# EAGLE board preauto (EAGLE 9.3.0)
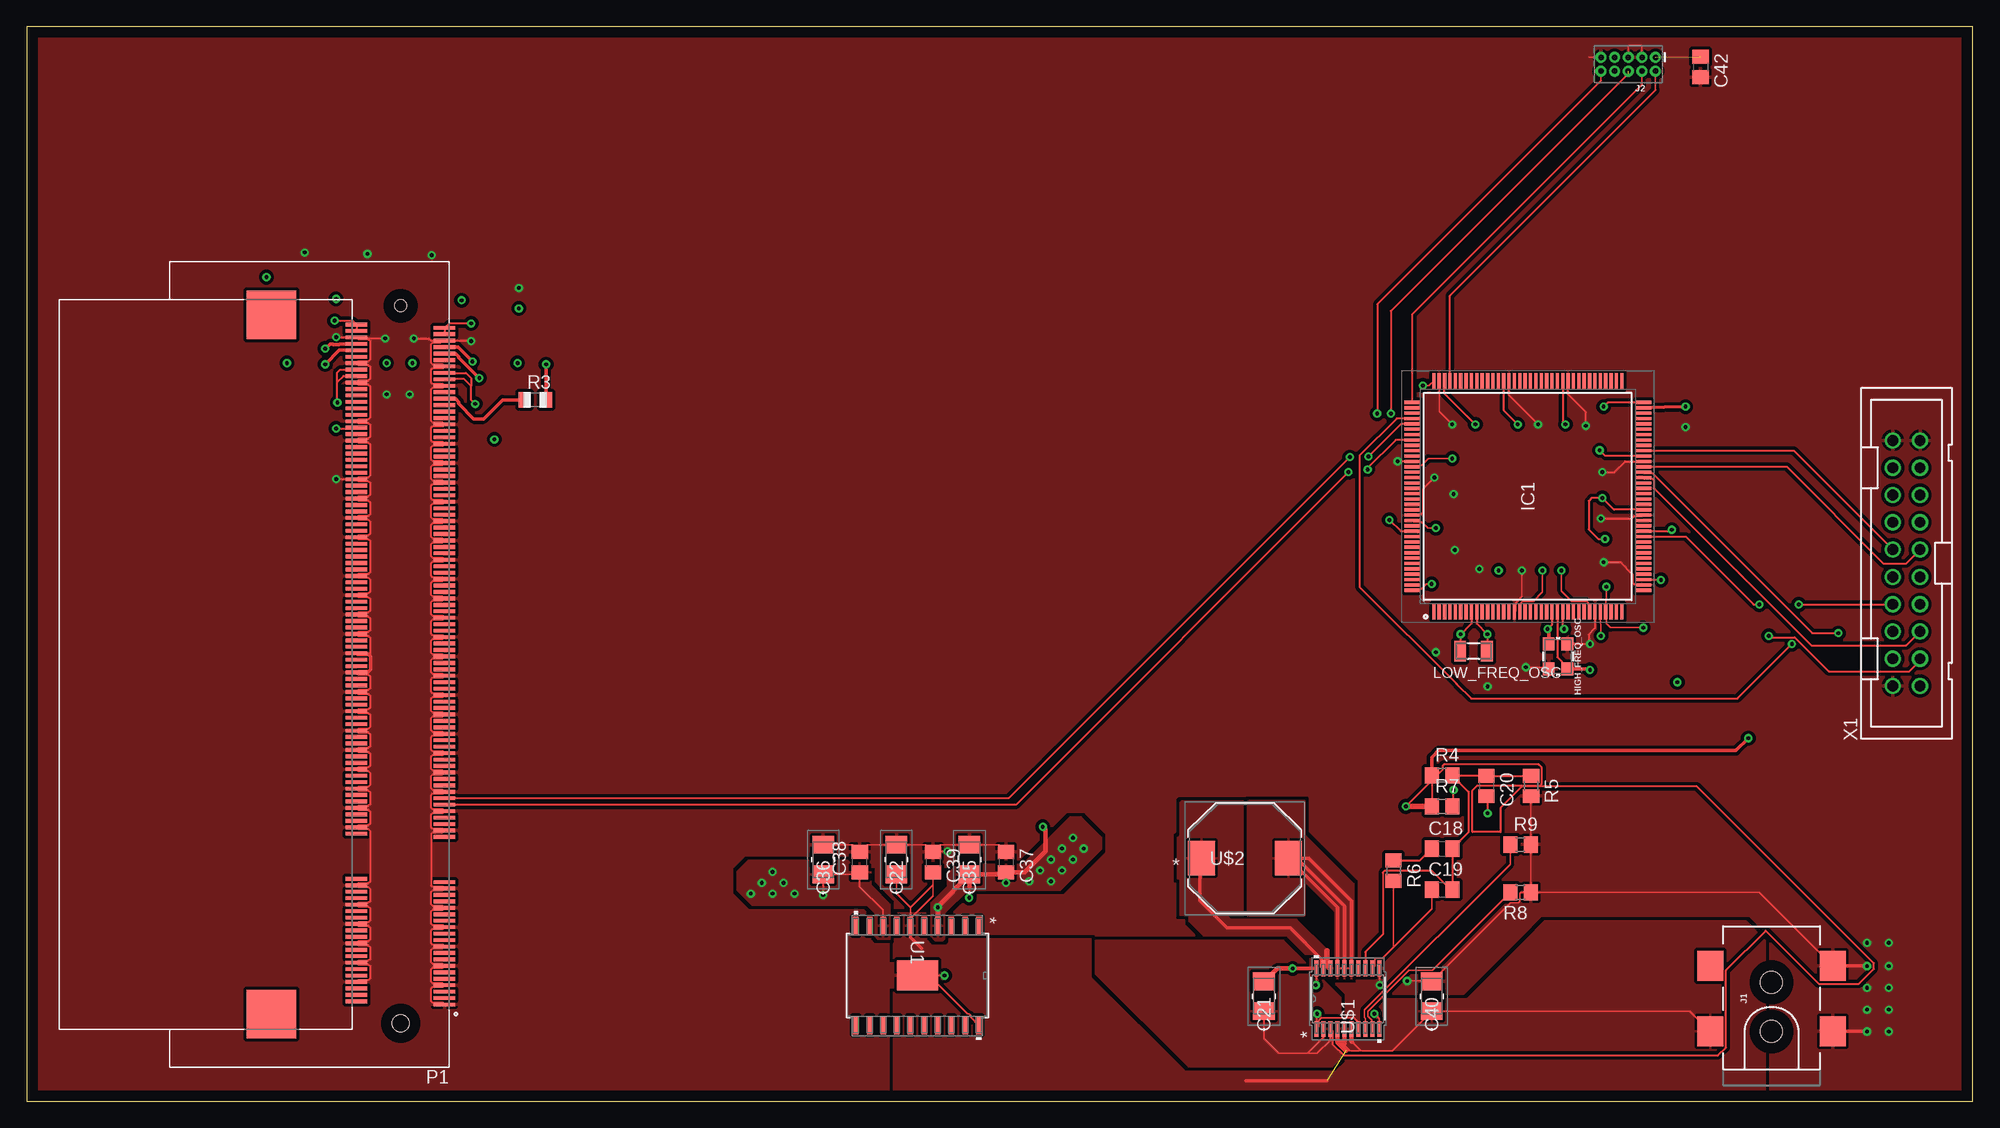
[diagram p0: board, top side]
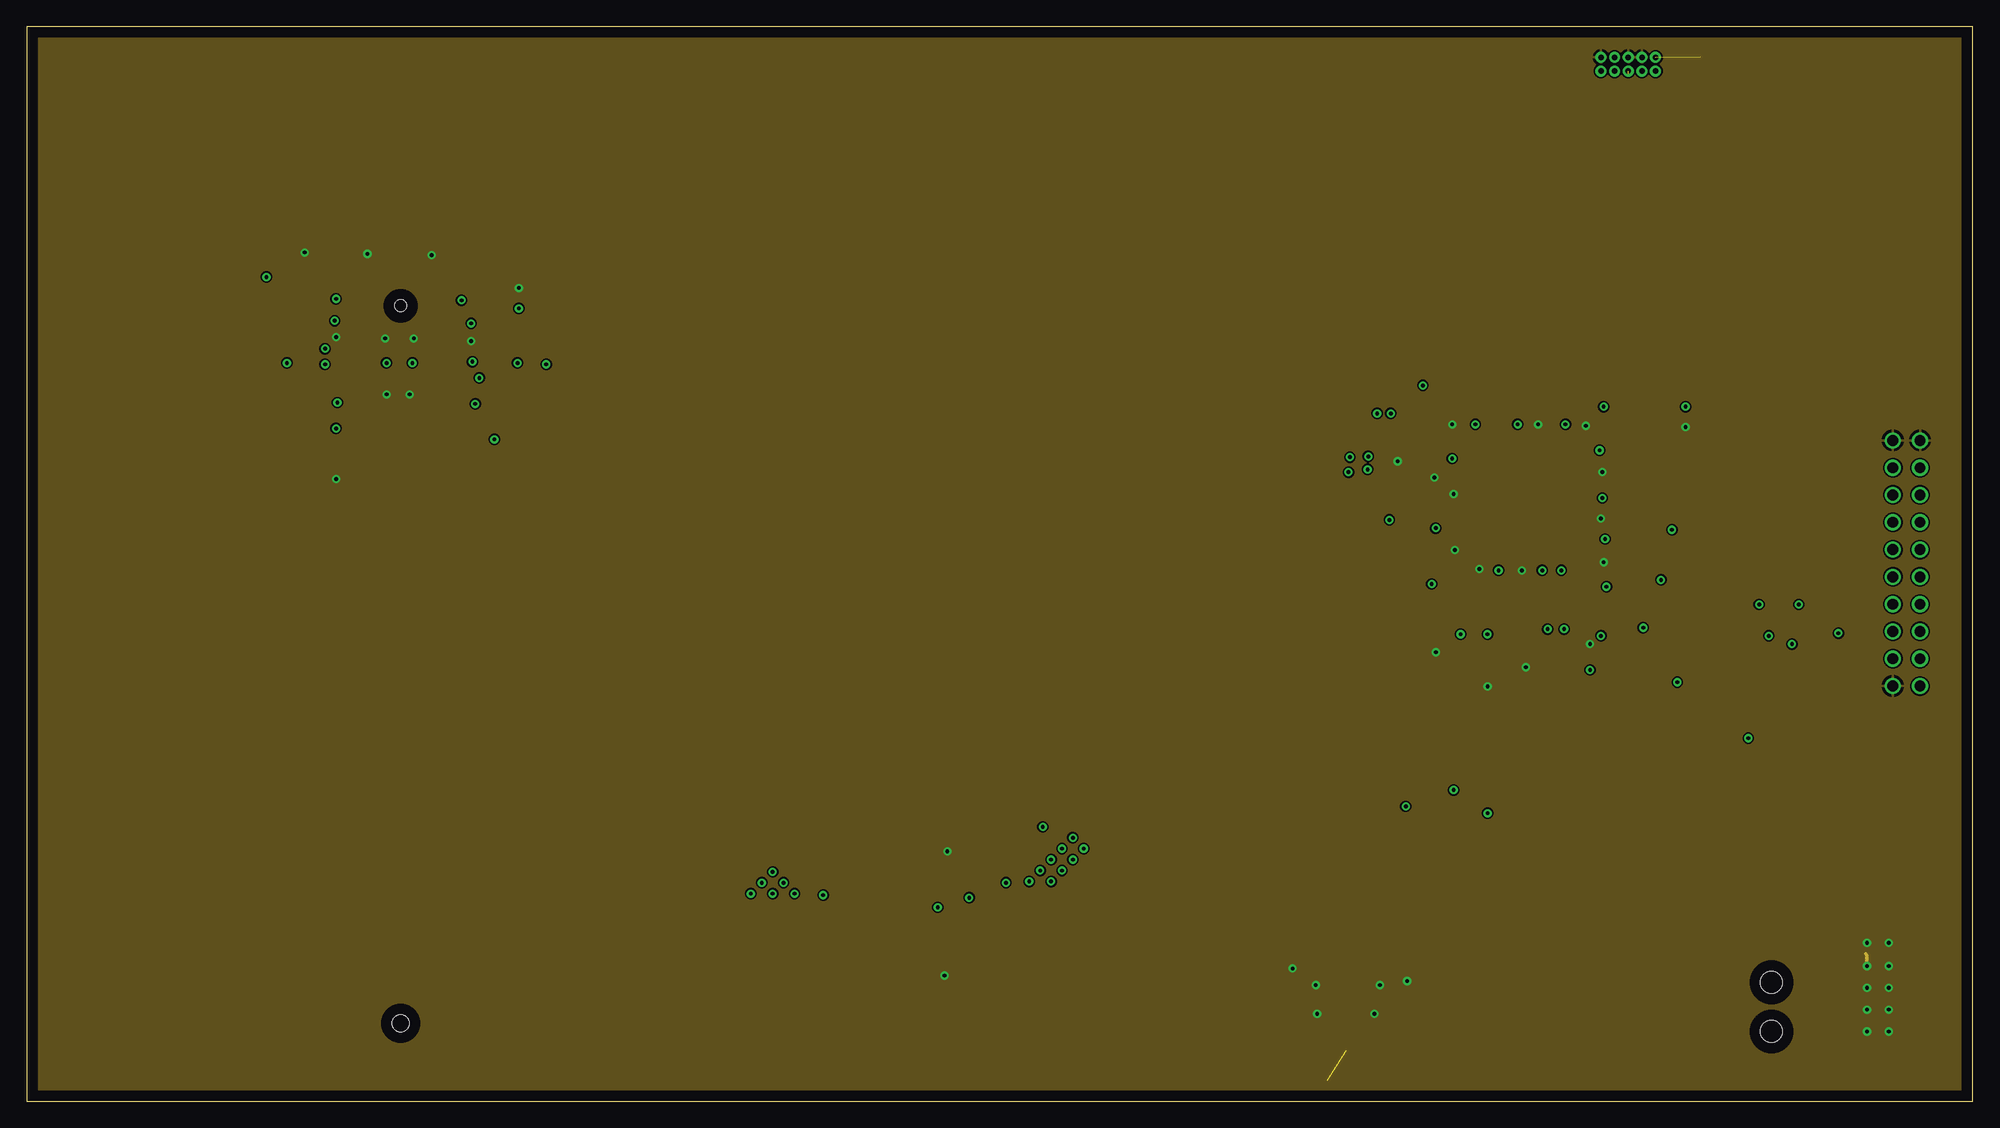
[diagram p1: board, inner layer Route2]
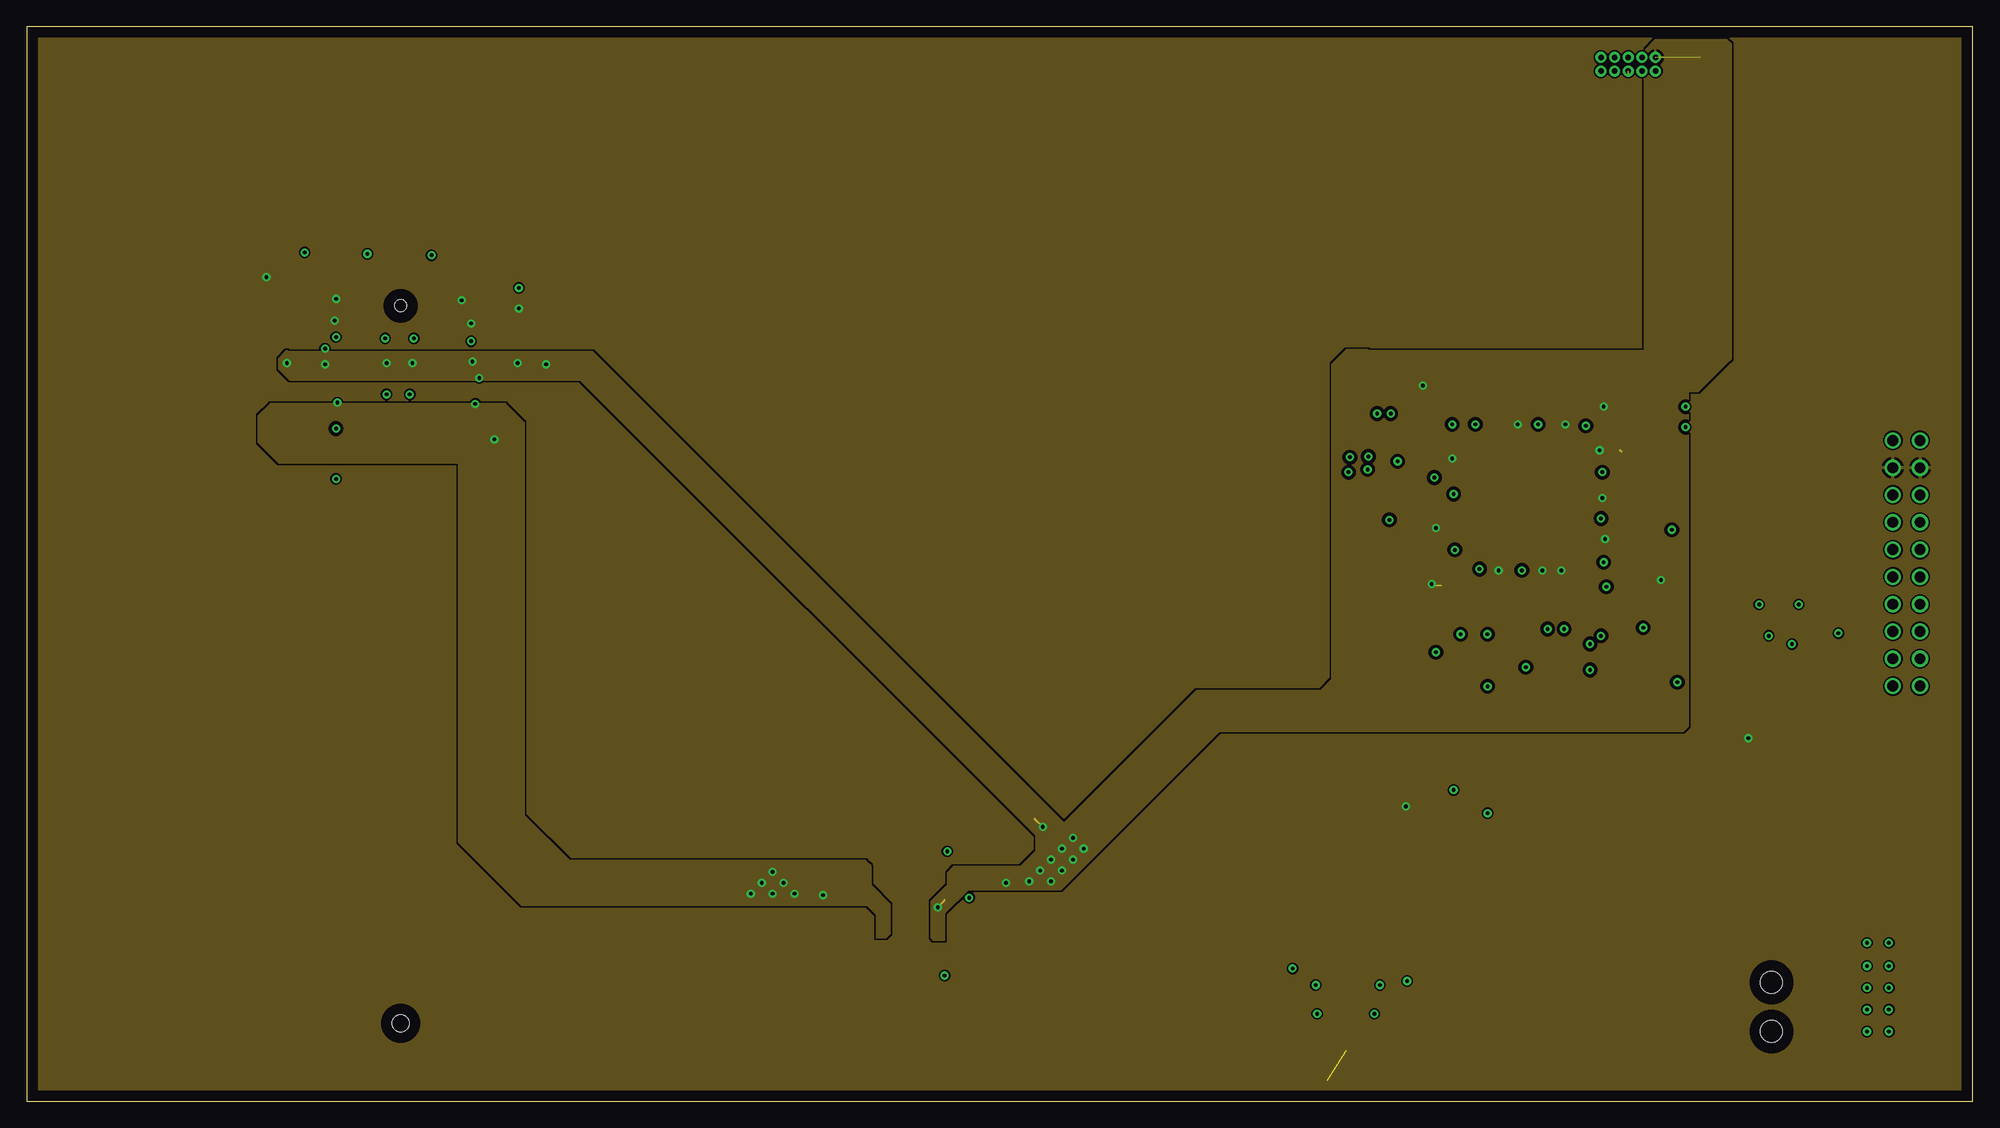
[diagram p2: board, inner layer Route3]
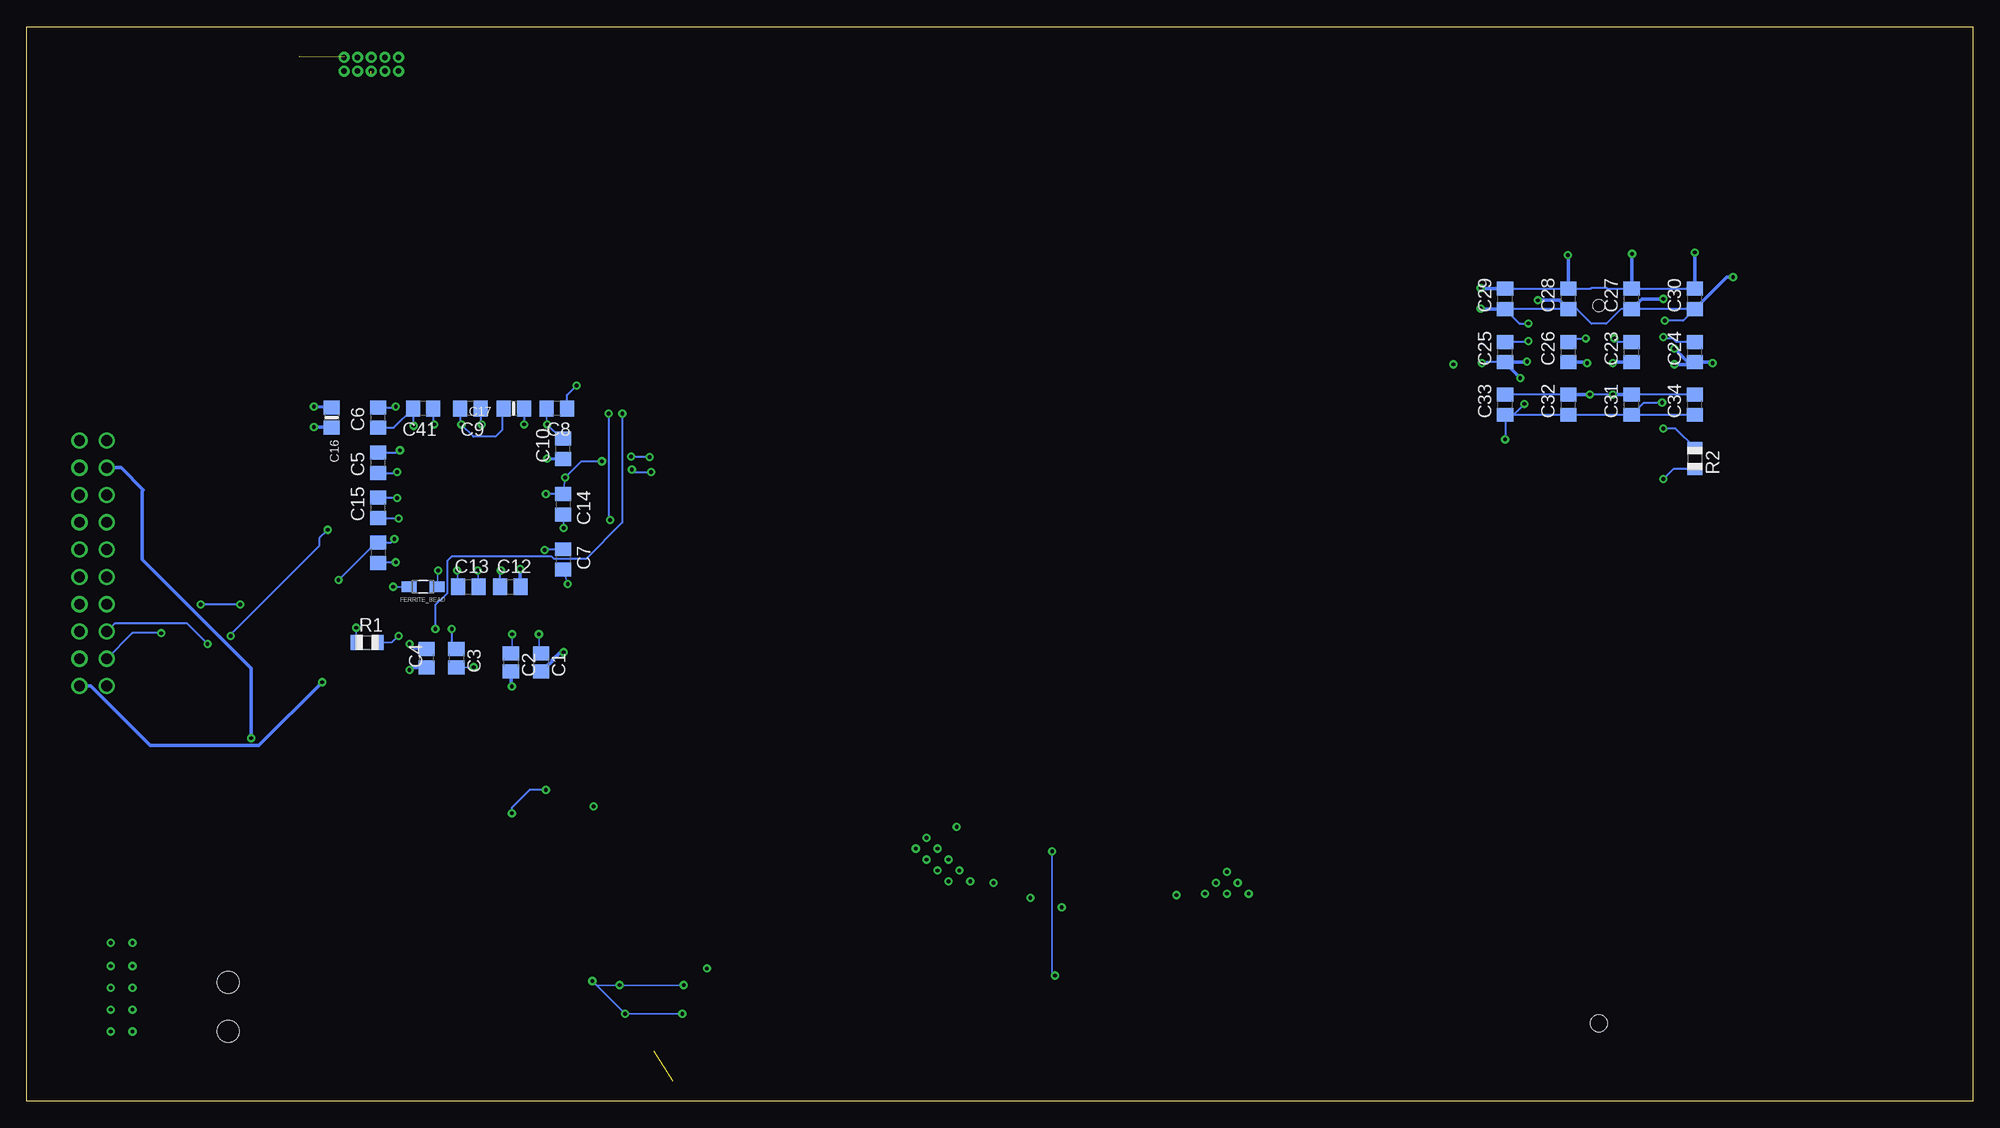
[diagram p3: board, bottom side, seen from below]

Size 181.1 x 100 mm. Coordinates in mm from the lower left corner, seen from the top.
Outline: 0,0 181.1,0 181.1,100 0,100 0,0
Copper layers (1+2*3+16): Top 0.035mm / dielectric 1.5mm / Route2 0.035mm / dielectric 0.15mm / Route3 0.035mm / dielectric 0.2mm / Bottom 0.035mm
Design rules "default *": minimum track width 6mil, minimum drill 0.35mm, track to track 6mil, track to pad 6mil, pad to pad 6mil, via to via 6mil, smd to smd 6mil, copper to edge 40mil, drill to drill 6mil, minimum pad ring 10mil, minimum via ring 8mil, stop-mask expansion 4mil, vias tented up to drill 0mil, thermal gap 10mil

## Footprints (pad centres in the part's own frame; a part is rotated, then mirrored left to right if it is on the bottom)
C0805 = smd 1.3 x 1.5: 1 -0.85,0; 2 0.85,0
C0805' = smd 1.3 x 1.5: 1 -0.95,0; 2 0.95,0
0805-NO = smd 1.3 x 1.5: 1 -0.95,0; 2 0.95,0
F95-A-M = smd 1.651 x 2.007: 1 -1.384,0; 2 1.384,0
WE-CBA_0805(W=4) = smd 1.4 x 1: 1 -1.3,0; 2 1.3,0
CRYSTAL-SMD-3.2X2.5MM = smd 1.2 x 1.1: 1 -1.175,-0.875; 2 1.175,-0.875; 3 1.175,0.875; 4 -1.175,0.875
QFP50P2200X2200X160-144N = smd 1.475 x 0.3: 1 -10.738,8.75; 2 -10.738,8.25; 3 -10.738,7.75; 4 -10.738,7.25; 5 -10.738,6.75; 6 -10.738,6.25; 7 -10.738,5.75; 8 -10.738,5.25; 9 -10.738,4.75; 10 -10.738,4.25; 11 -10.738,3.75; 12 -10.738,3.25; 13 -10.738,2.75; 14 -10.738,2.25; 15 -10.738,1.75; 16 -10.738,1.25; 17 -10.738,0.75; 18 -10.738,0.25; 19 -10.738,-0.25; 20 -10.738,-0.75; 21 -10.738,-1.25; 22 -10.738,-1.75; 23 -10.738,-2.25; 24 -10.738,-2.75; 25 -10.738,-3.25; 26 -10.738,-3.75; 27 -10.738,-4.25; 28 -10.738,-4.75; 29 -10.738,-5.25; 30 -10.738,-5.75; 31 -10.738,-6.25; 32 -10.738,-6.75; 33 -10.738,-7.25; 34 -10.738,-7.75; 35 -10.738,-8.25; 36 -10.738,-8.75; 73 10.738,-8.75; 74 10.738,-8.25; 75 10.738,-7.75; 76 10.738,-7.25; 77 10.738,-6.75; 78 10.738,-6.25; 79 10.738,-5.75; 80 10.738,-5.25; 81 10.738,-4.75; 82 10.738,-4.25; 83 10.738,-3.75; 84 10.738,-3.25; 85 10.738,-2.75; 86 10.738,-2.25; 87 10.738,-1.75; 88 10.738,-1.25; 89 10.738,-0.75; 90 10.738,-0.25; 91 10.738,0.25; 92 10.738,0.75; 93 10.738,1.25; 94 10.738,1.75; 95 10.738,2.25; 96 10.738,2.75; 97 10.738,3.25; 98 10.738,3.75; 99 10.738,4.25; 100 10.738,4.75; 101 10.738,5.25; 102 10.738,5.75; 103 10.738,6.25; 104 10.738,6.75; 105 10.738,7.25; 106 10.738,7.75; 107 10.738,8.25; 108 10.738,8.75 | smd 0.3 x 1.475: 37 -8.75,-10.738; 38 -8.25,-10.738; 39 -7.75,-10.738; 40 -7.25,-10.738; 41 -6.75,-10.738; 42 -6.25,-10.738; 43 -5.75,-10.738; 44 -5.25,-10.738; 45 -4.75,-10.738; 46 -4.25,-10.738; 47 -3.75,-10.738; 48 -3.25,-10.738; 49 -2.75,-10.738; 50 -2.25,-10.738; 51 -1.75,-10.738; 52 -1.25,-10.738; 53 -0.75,-10.738; 54 -0.25,-10.738; 55 0.25,-10.738; 56 0.75,-10.738; 57 1.25,-10.738; 58 1.75,-10.738; 59 2.25,-10.738; 60 2.75,-10.738; 61 3.25,-10.738; 62 3.75,-10.738; 63 4.25,-10.738; 64 4.75,-10.738; 65 5.25,-10.738; 66 5.75,-10.738; 67 6.25,-10.738; 68 6.75,-10.738; 69 7.25,-10.738; 70 7.75,-10.738; 71 8.25,-10.738; 72 8.75,-10.738; 109 8.75,10.738; 110 8.25,10.738; 111 7.75,10.738; 112 7.25,10.738; 113 6.75,10.738; 114 6.25,10.738; 115 5.75,10.738; 116 5.25,10.738; 117 4.75,10.738; 118 4.25,10.738; 119 3.75,10.738; 120 3.25,10.738; 121 2.75,10.738; 122 2.25,10.738; 123 1.75,10.738; 124 1.25,10.738; 125 0.75,10.738; 126 0.25,10.738; 127 -0.25,10.738; 128 -0.75,10.738; 129 -1.25,10.738; 130 -1.75,10.738; 131 -2.25,10.738; 132 -2.75,10.738; 133 -3.25,10.738; 134 -3.75,10.738; 135 -4.25,10.738; 136 -4.75,10.738; 137 -5.25,10.738; 138 -5.75,10.738; 139 -6.25,10.738; 140 -6.75,10.738; 141 -7.25,10.738; 142 -7.75,10.738; 143 -8.25,10.738; 144 -8.75,10.738
POWER_JACK_SMD = smd 2.8 x 2.4: GND 0,-5.7; P$4 6.1,-5.7; VIN0 0,5.7; VIN1 6.1,5.7 | hole 2.032: 0,0; 4.572,0
2X5-PTH-1.27MM = drill 0.508 pad 1: 1 -2.54,-0.635; 2 -2.54,0.635; 3 -1.27,-0.635; 4 -1.27,0.635; 5 0,-0.635; 6 0,0.635; 7 1.27,-0.635; 8 1.27,0.635; 9 2.54,-0.635; 10 2.54,0.635
FC135 = smd 1.1 x 1.9: X1 -1.25,0; X2 1.25,0
TE_1-1473005-4 = smd 2 x 0.35: 1 -4.1,31.65; 2 4.1,31.35; 3 -4.1,31.05; 4 4.1,30.75; 5 -4.1,30.45; 6 4.1,30.15; 7 -4.1,29.85; 8 4.1,29.55; 9 -4.1,29.25; 10 4.1,28.95; 11 -4.1,28.65; 12 4.1,28.35; 13 -4.1,28.05; 14 4.1,27.75; 15 -4.1,27.45; 16 4.1,27.15; 17 -4.1,26.85; 18 4.1,26.55; 19 -4.1,26.25; 20 4.1,25.95; 21 -4.1,25.65; 22 4.1,25.35; 23 -4.1,25.05; 24 4.1,24.75; 25 -4.1,24.45; 26 4.1,24.15; 27 -4.1,23.85; 28 4.1,23.55; 29 -4.1,23.25; 30 4.1,22.95; 31 -4.1,22.65; 32 4.1,22.35; 33 -4.1,22.05; 34 4.1,21.75; 35 -4.1,21.45; 36 4.1,21.15; 37 -4.1,20.85; 38 4.1,20.55; 39 -4.1,20.25; 40 4.1,19.95; 41 -4.1,16.05; 42 4.1,15.75; 43 -4.1,15.45; 44 4.1,15.15; 45 -4.1,14.85; 46 4.1,14.55; 47 -4.1,14.25; 48 4.1,13.95; 49 -4.1,13.65; 50 4.1,13.35; 51 -4.1,13.05; 52 4.1,12.75; 53 -4.1,12.45; 54 4.1,12.15; 55 -4.1,11.85; 56 4.1,11.55; 57 -4.1,11.25; 58 4.1,10.95; 59 -4.1,10.65; 60 4.1,10.35; 61 -4.1,10.05; 62 4.1,9.75; 63 -4.1,9.45; 64 4.1,9.15; 65 -4.1,8.85; 66 4.1,8.55; 67 -4.1,8.25; 68 4.1,7.95; 69 -4.1,7.65; 70 4.1,7.35; 71 -4.1,7.05; 72 4.1,6.75; 73 -4.1,6.45; 74 4.1,6.15; 75 -4.1,5.85; 76 4.1,5.55; 77 -4.1,5.25; 78 4.1,4.95; 79 -4.1,4.65; 80 4.1,4.35; 81 -4.1,4.05; 82 4.1,3.75; 83 -4.1,3.45; 84 4.1,3.15; 85 -4.1,2.85; 86 4.1,2.55; 87 -4.1,2.25; 88 4.1,1.95; 89 -4.1,1.65; 90 4.1,1.35; 91 -4.1,1.05; 92 4.1,0.75; 93 -4.1,0.45; 94 4.1,0.15; 95 -4.1,-0.15; 96 4.1,-0.45; 97 -4.1,-0.75; 98 4.1,-1.05; 99 -4.1,-1.35; 100 4.1,-1.65; 101 -4.1,-1.95; 102 4.1,-2.25; 103 -4.1,-2.55; 104 4.1,-2.85; 105 -4.1,-3.15; 106 4.1,-3.45; 107 -4.1,-3.75; 108 4.1,-4.05; 109 -4.1,-4.35; 110 4.1,-4.65; 111 -4.1,-4.95; 112 4.1,-5.25; 113 -4.1,-5.55; 114 4.1,-5.85; 115 -4.1,-6.15; 116 4.1,-6.45; 117 -4.1,-6.75; 118 4.1,-7.05; 119 -4.1,-7.35; 120 4.1,-7.65; 121 -4.1,-7.95; 122 4.1,-8.25; 123 -4.1,-8.55; 124 4.1,-8.85; 125 -4.1,-9.15; 126 4.1,-9.45; 127 -4.1,-9.75; 128 4.1,-10.05; 129 -4.1,-10.35; 130 4.1,-10.65; 131 -4.1,-10.95; 132 4.1,-11.25; 133 -4.1,-11.55; 134 4.1,-11.85; 135 -4.1,-12.15; 136 4.1,-12.45; 137 -4.1,-12.75; 138 4.1,-13.05; 139 -4.1,-13.35; 140 4.1,-13.65; 141 -4.1,-13.95; 142 4.1,-14.25; 143 -4.1,-14.55; 144 4.1,-14.85; 145 -4.1,-15.15; 146 4.1,-15.45; 147 -4.1,-15.75; 148 4.1,-16.05; 149 -4.1,-16.35; 150 4.1,-16.65; 151 -4.1,-16.95; 152 4.1,-17.25; 153 -4.1,-17.55; 154 4.1,-17.85; 155 -4.1,-18.15; 156 4.1,-18.45; 157 -4.1,-18.75; 158 4.1,-19.05; 159 -4.1,-19.35; 160 4.1,-19.65; 161 -4.1,-19.95; 162 4.1,-20.25; 163 -4.1,-20.55; 164 4.1,-20.85; 165 -4.1,-21.15; 166 4.1,-21.45; 167 -4.1,-21.75; 168 4.1,-22.05; 169 -4.1,-22.35; 170 4.1,-22.65; 171 -4.1,-22.95; 172 4.1,-23.25; 173 -4.1,-23.55; 174 4.1,-23.85; 175 -4.1,-24.15; 176 4.1,-24.45; 177 -4.1,-24.75; 178 4.1,-25.05; 179 -4.1,-25.35; 180 4.1,-25.65; 181 -4.1,-25.95; 182 4.1,-26.25; 183 -4.1,-26.55; 184 4.1,-26.85; 185 -4.1,-27.15; 186 4.1,-27.45; 187 -4.1,-27.75; 188 4.1,-28.05; 189 -4.1,-28.35; 190 4.1,-28.65; 191 -4.1,-28.95; 192 4.1,-29.25; 193 -4.1,-29.55; 194 4.1,-29.85; 195 -4.1,-30.15; 196 4.1,-30.45; 197 -4.1,-30.75; 198 4.1,-31.05; 199 -4.1,-31.35; 200 4.1,-31.65 | smd 4.6 x 4.5: P1 12,32.55; P2 12,-32.55 | hole 1.6: 0,33.4 | hole 1.1: 0,-33.4
R0805 = smd 1.1 x 1.4: 1 -1,0; 2 1,0
R0805' = smd 1.3 x 1.5: 1 -0.95,0; 2 0.95,0
DWP20_3P81X2P79-L = smd 1.676 x 0.508: 1 -4.636,5.715; 2 -4.636,4.445; 3 -4.636,3.175; 4 -4.636,1.905; 5 -4.636,0.635; 6 -4.636,-0.635; 7 -4.636,-1.905; 8 -4.636,-3.175; 9 -4.636,-4.445; 10 -4.636,-5.715; 11 4.636,-5.715; 12 4.636,-4.445; 13 4.636,-3.175; 14 4.636,-1.905; 15 4.636,-0.635; 16 4.636,0.635; 17 4.636,1.905; 18 4.636,3.175; 19 4.636,4.445; 20 4.636,5.715 | smd 2.79 x 3.81: EPAD 0,0
TSSOP-20_FE/CA = smd 1.473 x 0.356: 1 -2.819,2.926; 2 -2.819,2.276; 3 -2.819,1.626; 4 -2.819,0.975; 5 -2.819,0.325; 6 -2.819,-0.325; 7 -2.819,-0.975; 8 -2.819,-1.626; 9 -2.819,-2.276; 10 -2.819,-2.926; 11 2.819,-2.926; 12 2.819,-2.276; 13 2.819,-1.626; 14 2.819,-0.975; 15 2.819,-0.325; 16 2.819,0.325; 17 2.819,0.975; 18 2.819,1.626; 19 2.819,2.276; 20 2.819,2.926
IND_10040 = smd 2.5 x 3.2: 1 -4.05,0; 2 4.05,0
PAK100/2500-20 = drill 1 pad 1.422: 1 -11.43,-1.27; 2 -11.43,1.27; 3 -8.89,-1.27; 4 -8.89,1.27; 5 -6.35,-1.27; 6 -6.35,1.27; 7 -3.81,-1.27; 8 -3.81,1.27; 9 -1.27,-1.27; 10 -1.27,1.27; 11 1.27,-1.27; 12 1.27,1.27; 13 3.81,-1.27; 14 3.81,1.27; 15 6.35,-1.27; 16 6.35,1.27; 17 8.89,-1.27; 18 8.89,1.27; 19 11.43,-1.27; 20 11.43,1.27

## Placement (x,y rotation side)
C1  1.2pF  [C0805]  133.25,40.84 270 bottom
C2  1.2pF  [C0805]  136.05,40.84 270 bottom
C3  20pF  [C0805]  141.13,41.22 270 bottom
C4  20pF  [C0805]  143.9,41.22 90 bottom
C5  100nF  [C0805']  148.41,59.44 90 bottom
C6  100nF  [C0805']  148.41,63.63 90 bottom
C7  100nF  [C0805']  131.18,50.42 270 bottom
C8  100nF  [C0805']  131.77,64.45 180 bottom
C9  [C0805']  139.8,64.45 180 bottom
C10  100nF  [C0805']  131.18,60.71 90 bottom
C11  100nF  [C0805']  148.41,51.05 270 bottom
C12  100nF  [C0805']  136.09,47.88 0 bottom
C13  100nF  [C0805']  140.02,47.88 0 bottom
C14  100nF  [C0805']  131.18,55.56 270 bottom
C15  100nF  [C0805']  148.41,55.24 90 bottom
C16  2.2uF  [0805-NO]  152.73,63.63 270 bottom
C17  2.2uF  [0805-NO]  135.79,64.45 180 bottom
C18  680pF  [C0805']  131.71,23.5 0 top
C19  12pF  [C0805']  131.71,19.68 0 top
C20  47pF  [C0805']  135.84,29.34 270 top
C21  100UFCAPF95-A-M  [F95-A-M]  115.14,9.75 90 top
C22  100UFCAPF95-A-M  [F95-A-M]  80.92,22.48 90 top
C23  100nF  [C0805']  31.74,69.72 90 bottom
C24  1uF  [C0805']  25.85,69.72 90 bottom
C25  1uF  [C0805']  43.51,69.72 90 bottom
C26  100nF  [C0805']  37.62,69.72 90 bottom
C27  1uF  [C0805']  31.74,74.68 90 bottom
C28  100nF  [C0805']  37.62,74.68 90 bottom
C29  1uF  [C0805']  43.51,74.68 90 bottom
C30  100nF  [C0805']  25.85,74.68 90 bottom
C31  1uF  [C0805']  31.74,64.83 90 bottom
C32  100nF  [C0805']  37.62,64.83 90 bottom
C33  1uF  [C0805']  43.51,64.83 90 bottom
C34  100nF  [C0805']  25.85,64.83 90 bottom
C35  100UFCAPF95-A-M  [F95-A-M]  87.73,22.48 90 top
C36  100UFCAPF95-A-M  [F95-A-M]  74.11,22.48 90 top
C37  100nF  [C0805']  91.13,22.25 270 top
C38  100nF  [C0805']  77.52,22.25 90 top
C39  100nF  [C0805']  84.33,22.25 270 top
C40  100UFCAPF95-A-M  [F95-A-M]  130.76,9.75 90 top
C41  100nF  [C0805']  144.22,64.45 180 bottom
C42  100nF  [C0805']  155.78,96.27 270 top
DRILEGEND  [DRILEGEND]  -2.82,-11.62 0 top  (outside the outline)
FERRITE_BEAD  [WE-CBA_0805(W=4)]  144.22,47.88 180 bottom
HIGH_FREQ_OSC  25 MHZ  [CRYSTAL-SMD-3.2X2.5MM]  142.51,41.39 270 top
IC1  STM32F746ZGT6  [QFP50P2200X2200X160-144N]  139.7,56.3 90 top
J1  5.5x2.1mm Barrel  [POWER_JACK_SMD]  162.38,6.48 90 top
J2  CORTEX_DEBUG_PTH  [2X5-PTH-1.27MM]  149.04,96.52 180 top
LOW_FREQ_OSC  [FC135]  134.65,41.89 0 top
P1  1-1473005-4  [TE_1-1473005-4]  34.78,40.64 180 top
R1  0  [R0805]  149.43,42.67 0 bottom
R2  1k  [R0805]  25.85,59.82 270 bottom
R3  10k  [R0805]  47.32,65.28 0 top
R4  887k  [R0805']  131.71,30.33 0 top
R5  121k  [R0805']  140,29.34 270 top
R6  49.9k  [R0805']  127.2,21.46 270 top
R7  6.49k  [R0805']  131.71,27.43 0 top
R8  90.9k  [R0805']  139.01,19.43 180 top
R9  1k  [R0805']  139.01,23.88 0 top
U1  TPPM0110DWPRDWP20_3P81X2P79-L  [DWP20_3P81X2P79-L]  82.88,11.68 270 top
U$1  LTC3113  [TSSOP-20_FE/CA]  122.95,9.53 90 top
U$2  2.2UHINDUCTOR  [IND_10040]  113.36,22.61 0 top
X1  2520-  [PAK100/2500-20]  174.94,50.07 90 top

## Library data of the parts
C1-C4 = adafruit
C5-C15 C18-C20 C23-C34 C37-C39 C41 C42 = rcl; SPICEPREFIX: C
C16 C17 R1-R3 = audio amplifier example
C21 C22 C35 C36 C40 = 477_LIBRARY; MANUFACTURER_PART_NUMBER: F951A107KAAAQ2; VENDOR: AVX Corporation
DRILEGEND = drilegend
FERRITE_BEAD = Wurth_Elektronik_Passive_rev18f
HIGH_FREQ_OSC = SparkFun-Clocks; PROD_ID: XTAL-12454
IC1 = 477_LIBRARY; DESCRIPTION: ARM Microcontrollers - MCU High-performance and DSP with FPU, ARM Cortex-M7 MCU with 1 Mbytes Flash, 200 MHz CPU, Art Accelerator, L1 cache, SDRAM; HEIGHT: 1.6mm; MANUFACTURER_NAME: STMicroelectronics; MANUFACTURER_PART_NUMBER: STM32F746ZGT6; MOUSER_PART_NUMBER: 511-STM32F746ZGT6; MOUSER_PRICE-STOCK: https://www.mouser.com/Search/Refine.aspx?Keyword=511-STM32F746ZGT6; RS_PART_NUMBER: 8820290; RS_PRICE-STOCK: http://uk.rs-online.com/web/p/products/8820290
J1 = SparkFun-Connectors; PROD_ID: CONN-08106; SF_ID: PRT-12748
J2 = SparkFun-Connectors
LOW_FREQ_OSC = mbed-HDK-Oscillator
P1 = Rpi-DDR2; AVAILABILITY: Unavailable; CENTERLINE_PITCH: .6 mm[.024 in]; COMMENT: 1-1473005-4; DESCRIPTION: SEMI-HARD TRAY DDR2 SODIMM SOCKET 200P 5; MF: TE Connectivity; MP: 1-1473005-4; NUMBER_OF_POSITIONS: 200; PACKAGE: None; PRICE: None; PRODUCT_TYPE: Socket; TE_PURCHASE_URL: https://www.te.com/usa-en/product-1-1473005-4.html?te_bu=Cor&te_type=disp&te_campaign=seda_glo_cor-seda-global-disp-prtnr-fy19-seda-model-bom-cta_sma-317_1&elqCampaignId=32493
R4-R9 = resistor
U1 = 477_LIBRARY; MANUFACTURER_PART_NUMBER: TPPM0110DWPR; VENDOR: Texas Instruments
U$1 U$2 = 477_LIBRARY
X1 = con-3m; OC_FARNELL: unknown; OC_NEWARK: unknown

## Nets
1.8V: C31.1 C32.1 C33.1 C34.1 C36.1 C38.1 P1.183 P1.184 P1.185 P1.186 U1.8
3.3V: X1.1
5VIN: C22.1 C39.2 C40.1 J1.VIN0 U1.6 U$1.4 U$1.5 U$1.6
5VOUT: C21.1 C27.1 C28.1 C29.1 C30.1 P1.197 P1.198 P1.199 P1.200 R4.1 R7.1 U$1.2 U$1.3 X1.17 X1.18
FT_PD: IC1.47 X1.8
GND: C1.2 C2.2 C3.2 C4.2 C5.1 C6.1 C7.1 C8.2 C9.2 C10.2 C11.2 C12.2 C13.2 C14.1 C15.1 C16.2 C17.2 C21.2 C22.2 C23.2 C24.2 C25.2 C26.2 C27.2 C28.2 C29.2 C30.2 C31.2 C32.2 C33.2 C34.2 C35.2 C36.2 C37.1 C38.2 C39.1 C40.2 C41.2 C42.2 HIGH_FREQ_OSC.2 HIGH_FREQ_OSC.4 IC1.16 IC1.31 IC1.38 IC1.51 IC1.61 IC1.83 IC1.94 IC1.107 IC1.120 IC1.130 J1.GND J1.P$4 J2.3 J2.5 J2.9 P1.1 P1.7 P1.8 P1.13 P1.14 P1.19 P1.20 P1.25 P1.26 P1.31 P1.32 P1.37 P1.38 P1.43 P1.44 P1.49 P1.50 P1.55 P1.56 P1.61 P1.62 P1.67 P1.68 P1.73 P1.74 P1.79 P1.80 P1.85 P1.86 P1.91 P1.92 P1.97 P1.98 P1.103 P1.104 P1.109 P1.110 P1.115 P1.116 P1.121 P1.122 P1.127 P1.133 P1.134 P1.139 P1.140 P1.145 P1.146 P1.151 P1.152 P1.157 P1.163 P1.164 P1.169 P1.170 P1.181 P1.182 P1.187 P1.188 P1.195 P1.196 R2.2 R5.2 R8.1 R9.2 U1.20 U1.EPAD U$1.1 U$1.7 U$1.10 U$1.11 U$1.20 X1.2 X1.19 X1.20
KEY: J2.7
N$1: C16.1 IC1.71
N$2: C17.1 IC1.106
N$3: C20.2 R7.2
N$4: C19.1 R6.2 U$1.12
N$5: C18.1 R6.1
N$6: C18.2 C19.2 C20.1 R4.2 R5.1 U$1.13
N$7: U$1.15 U$1.16 U$1.17 U$2.2
N$8: U$1.18 U$1.19 U$2.1
N$9: R8.2 U$1.9
N$10: R9.1 U$1.8
N$19: J2.8
N$20: X1.13
N$21: X1.14
OSC32_IN: C1.1 IC1.8 LOW_FREQ_OSC.X1
OSC32_OUT: C2.1 IC1.9 LOW_FREQ_OSC.X2
OSC_IN: C3.1 HIGH_FREQ_OSC.1 IC1.23
OSC_OUT: C4.1 HIGH_FREQ_OSC.3 IC1.24
QIO0: IC1.58 X1.5
QIO1: IC1.59 X1.4
QIO2: IC1.60 X1.11
QIO3: IC1.63 X1.12
QSPI_CS: IC1.112 X1.6
QSPICLK: IC1.48 X1.3
RESET: IC1.25 J2.10
RUN: P1.177 R3.1
RUN_5V: U$1.14
SWCLK: IC1.109 J2.4
SWDIO: IC1.105 J2.2
SWO: IC1.133 J2.6
UART5_RX: IC1.116 P1.51
UART5_TX: IC1.113 P1.53
USB_OTGID: P1.168 R2.1
VBATSTM: IC1.5
VDD: C5.2 C6.2 C7.2 C8.1 C9.1 C10.1 C11.1 C12.1 C13.1 C14.2 C15.2 C23.1 C24.1 C25.1 C26.1 C35.1 C37.2 C41.1 C42.1 FERRITE_BEAD.1 IC1.17 IC1.30 IC1.39 IC1.52 IC1.62 IC1.72 IC1.84 IC1.95 IC1.108 IC1.121 IC1.131 IC1.144 J2.1 P1.191 P1.192 P1.193 P1.194 R3.2 U1.4
VDDA: FERRITE_BEAD.2 IC1.33 R1.1
VREF: IC1.32 R1.2

## Tracks (layer width: path | path; a pad name or v marks a point on that pad's centre or on a via)
1.8V  (via drill 0.35)
  Top 0.152: C38.1 77.52,21.08 | 77.52,21.08 77.52,19.96 79.7,17.78 U1.8 | C36.1 74.13,21.08 77.52,21.08
  Top 0.203: v28.9,65.02 28.9,66.93 | 28.9,66.93 29.46,67.49 P1.184 | 28.9,66.93 28.9,67.82 29.17,68.09 P1.186 | v41.73,64.9 41.35,65.28 41.35,66.55 | 41.35,66.55 40.71,67.19 P1.183 | P1.185 40.87,67.79 41.35,67.31 41.35,66.55 | C36.1 v74.11,19.18
  Bottom 0.203: C34.1 C31.1 | C31.1 C32.1 C33.1 | C31.1 30.6,65.02 v28.9,65.02 | C33.1 42.74,63.88 v41.73,64.9 | C33.1 v43.51,61.59 | v43.51,61.59
  other vias: 67.38,19.3 68.4,20.32 69.42,21.34 70.43,20.32 69.42,19.3 71.45,19.3
  pour Route3 (isolate 0.305): 79.58,15.24 79.96,15.24 80.34,15.62 80.34,18.29 78.56,20.07 78.56,21.84 78.31,22.1 78.05,22.35 72.46,22.35 50.49,22.35 46.3,26.54 46.3,63.12 44.52,64.9 22.68,64.9 21.54,63.75 21.54,61.34 23.44,59.44 40.21,59.44 40.21,24.13 46.05,18.29 78.18,18.29 78.94,17.53 79.07,17.4 79.07,15.24
  pour Top (isolate 0.305): 79.07,17.4 79.19,17.27 79.19,15.37 79.45,15.11 80.21,15.11 80.34,15.24 80.34,18.29 78.56,20.07 78.56,21.84 78.05,22.35 67.13,22.35 66.11,21.34 66.11,19.68 67.51,18.29 78.18,18.29
  pour Top: 78.94,17.53 78.94,15.37 79.19,15.11 79.58,15.11 80.34,15.11 80.34,17.53
3.3V  (via drill 0.35)
  Bottom 0.305: X1.1 175.17,38.64 169.63,33.1 159.51,33.1 v153.62,38.99
5VIN  (1 unrouted)
  Top 0.152: 124.15,4.7 127.09,4.7 C40.1 154.79,8.37 J1.VIN0 | 123.33,5.52 124.15,4.7 | 124.15,4.7 123.14,4.7 | U$1.5 122.62,5.46 122.62,5.33 122.62,5.21 123.14,4.7 | 122.76,4.7 123.14,4.7 | 82.24,18.03 U1.6 82.24,17.02 84.33,19.1 C39.2 84.33,20.12 82.24,18.03 | C22.1 80.92,19.36 82.24,18.03
  Top 0.305: U1.6 82.24,15.24 83.26,14.22 | 113.48,1.91 120.98,1.91
  Top 0.406: U$1.4 121.97,5.48 121.99,5.46 | 121.99,5.46 122.76,4.7 | 121.99,5.46 122.62,5.46 | U$1.5 122.62,5.33 | U$1.6 123.27,5.58 123.33,5.52
  pour Top (isolate 0.305, rank 3): 81.1,17.53 83.64,17.53 83.77,17.4 84.4,16.76 84.4,15.11 108.28,15.11 113.87,9.53 134.06,9.53 139.52,14.99 141.3,16.76 159.97,16.76 161.75,14.99 161.75,1.02 80.72,1.02 80.72,17.14
  pour Top (isolate 0.305, rank 2): 121.87,7.49 121.87,2.67 123.77,2.67 123.64,2.79 123.64,7.49
5VOUT  (via drill 0.35)
  Top 0.152: U$1.2 120.67,5.92 119.2,4.45 | 119.2,4.45 116.53,4.45 115.14,5.84 C21.1 | U$1.3 121.32,5.68 120.09,4.45 119.2,4.45
  Top 0.203: R4.1 R7.1 | v41.35,72.39 39.28,72.39 P1.199 P1.197 | v28.65,72.64 30.33,72.64 P1.200 P1.198 | U$1.3 121.51,6.51 121.51,5.29 122.57,4.24 157.4,4.24 158.13,4.97 158.13,12.16 161.84,15.86 166.77,10.92 170.51,10.92 171.9,12.31 171.9,12.84 155.45,29.29 139.15,29.29 137.16,27.3 137.16,25.04 134.54,25.04 134.54,28.94 134.98,29.38 140.86,29.38 141.01,29.53 141.01,31.04 140.72,31.33 131.9,31.33 131.76,31.18 131.76,30.84 v128.34,27.43
  Top 0.305: R4.1 130.76,32.01 131.39,32.64 159.08,32.64 v160.22,33.78
  Top 0.508: R7.1 v128.34,27.43
  Bottom 0.203: v41.35,72.39 42.17,72.39 C29.1 C28.1 36.83,73.73 35.47,72.37 34.09,72.37 32.74,73.73 C27.1 C30.1 26.94,72.64 v28.65,72.64
  Bottom 0.305: v160.22,33.78 160.22,40.26 170.38,50.42 170.38,56.77 170.25,56.9 172.32,58.96 X1.18 | C29.1 45.73,73.73 v45.79,73.79 | C28.1 38.45,74.55 v40.46,74.55 | C27.1 30.79,74.68 v28.78,74.68 | C30.1 22.87,76.71 v22.3,76.71
  pour Route3 (rank 3): -0.82,-0.64 -0.82,103.5 189.05,103.5 189.05,0 8.51,-9.96
  pour Route3 (isolate 0.305, rank 3): 0.07,100.33 115.64,100.33 115.77,100.2 116.02,99.95 116.02,0.13 0.07,0.13 -0.18,-0.13 -0.18,100.08
  pour Top (isolate 0.305): 99.51,14.99 116.91,14.99 122.25,9.65 122.25,3.94 121.49,3.17 108.15,3.17 99.51,11.81
  pour Route3 (isolate 0.305, rank 3): 120.85,7.62 121.49,7.62 121.61,7.49 121.61,5.46 122.5,4.57 122.5,3.56 121.87,2.92 108.02,2.92 99.26,11.68 99.26,15.11 117.93,33.78 159.08,33.78 159.08,58.55 160.86,60.33 179.78,60.33 179.78,57.78 179.91,57.66 162.51,57.66 162,57.15 162,33.53 159.71,31.24 131.9,31.24 131.77,31.11 131.77,25.91 131.39,25.53 129.23,25.53 117.42,13.72 116.79,13.08 116.79,6.1 119.33,6.1
FT_PD  (via drill 0.35)
  Top 0.203: IC1.47 154.41,52.55 160.73,46.23 v161.24,46.23 | v164.92,46.23 173.64,46.23 X1.8
  Bottom 0.203: v161.24,46.23 v164.92,46.23
GND  (via drill 0.35)
  Top 0.152: HIGH_FREQ_OSC.4 145.47,42.56 v145.49,42.55 | v139.52,40.39 141.47,40.39 HIGH_FREQ_OSC.2 | IC1.16 138.57,45.68 138.57,46.39 139.14,46.96 v139.14,49.4 | IC1.130 129.08,54.67 129.79,54.67 129.93,54.8 129.93,56.95 v131.01,58.04 | IC1.107 131.45,64.21 v132.66,62.99 | J1.P$4 161.23,19.43 R8.1 | R8.1 R9.2 139.96,28.35 R5.2 | R8.1 139.05,19.43 138.94,19.32 138.94,18.59 138.81,18.45 138.07,18.45 C40.2 130.72,11.18 v128.47,11.18 | U$1.20 120.02,10.85 v119.96,10.79 | U$1.11 125.87,10.85 v125.93,10.79 | U$1.10 125.87,7.68 v125.42,8.13 | v120.09,8.13 120.09,6.77 U$1.1 120.26,6.95 120.26,7.54 120.47,7.75 123.52,7.75 123.92,7.34 U$1.7 | C36.2 76.86,23.86 C38.2 78.18,23.86 C22.2 83.66,23.86 C39.1 | C37.1 90.47,23.86 C35.2 84.99,23.86 C39.1 | U1.20 87.81,7.84 87.81,7.98 87.67,8.12 87.53,8.12 83.96,11.68 U1.EPAD v85.42,11.68 | v85.67,23.24 84.37,23.24 C39.1 | J2.5 149.04,98.3 150.31,98.3 J2.3 | J2.9 145.36,97.16
  Top 0.203: v146.76,50.16 148.32,50.16 149.44,49.04 149.44,48.29 149.59,48.14 150.34,48.14 IC1.38 | IC1.51 150.34,54.45 149.59,54.45 149.37,54.23 v146.5,54.23 | v146.63,58.55 147.77,58.55 148.77,59.55 IC1.61 | v145.11,62.87 145.11,64.14 143.45,65.8 IC1.83 | v140.66,62.99 137.95,65.71 IC1.94 | v28.78,71.12 30.65,71.12 P1.196 | v33.35,70.99 30.78,70.99 P1.196 | v36.01,70.99 37.41,70.99 37.61,70.79 38.68,70.79 | 38.68,70.79 P1.195 41.3,70.79 v41.35,70.74 | v28.78,57.91 28.8,57.89 P1.152 | P1.1 38.71,9.16 37.78,9.16 37.63,9.31 37.63,10.47 37.78,10.62 38.71,10.62 P1.7 38.71,10.96 37.78,10.96 37.63,11.11 37.63,12.27 37.78,12.42 38.71,12.42 P1.13 38.71,12.76 37.78,12.76 37.63,12.91 37.63,14.07 37.78,14.22 38.71,14.22 P1.19 38.71,14.56 37.78,14.56 37.63,14.71 37.63,15.87 37.78,16.02 38.71,16.02 P1.25 38.71,16.36 37.78,16.36 37.63,16.51 37.63,17.67 37.78,17.82 38.71,17.82 P1.31 38.71,18.16 37.78,18.16 37.63,18.31 37.63,19.47 37.78,19.62 38.71,19.62 P1.37 38.71,19.96 37.78,19.96 37.63,20.11 37.63,24.87 37.78,25.02 38.71,25.02 P1.43 38.71,25.36 37.78,25.36 37.63,25.51 37.63,26.67 37.78,26.82 38.71,26.82 P1.49 38.71,27.16 37.78,27.16 37.63,27.31 37.63,28.47 37.78,28.62 38.71,28.62 P1.55 38.71,28.96 37.78,28.96 37.63,29.11 37.63,30.27 37.78,30.42 38.71,30.42 P1.61 38.71,30.76 37.78,30.76 37.63,30.91 37.63,32.07 37.78,32.22 38.71,32.22 P1.67 38.71,32.56 37.78,32.56 37.63,32.71 37.63,33.87 37.78,34.02 38.71,34.02 P1.73 38.71,34.36 37.78,34.36 37.63,34.51 37.63,35.67 37.78,35.82 38.71,35.82 P1.79 38.71,36.16 37.78,36.16 37.63,36.31 37.63,37.47 37.78,37.62 38.71,37.62 P1.85 38.71,37.96 37.78,37.96 37.63,38.11 37.63,39.27 37.78,39.42 38.71,39.42 P1.91 38.71,39.76 37.78,39.76 37.63,39.91 37.63,41.07 37.78,41.22 38.71,41.22 P1.97 38.71,41.56 37.78,41.56 37.63,41.71 37.63,42.87 37.78,43.02 38.71,43.02 P1.103 38.71,43.36 37.78,43.36 37.63,43.51 37.63,44.67 37.78,44.82 38.71,44.82 P1.109 38.71,45.16 37.78,45.16 37.63,45.31 37.63,46.47 37.78,46.62 38.71,46.62 P1.115 38.71,46.96 37.78,46.96 37.63,47.11 37.63,48.27 37.78,48.42 38.71,48.42 P1.121 38.71,48.76 37.78,48.76 37.63,48.91 37.63,50.07 37.78,50.22 38.71,50.22 P1.127 38.71,50.56 37.78,50.56 37.63,50.71 37.63,51.87 37.78,52.02 38.71,52.02 P1.133 38.71,52.36 37.78,52.36 37.63,52.51 37.63,53.67 37.78,53.82 38.71,53.82 P1.139 38.71,54.16 37.78,54.16 37.63,54.31 37.63,55.47 37.78,55.62 38.71,55.62 P1.145 38.71,55.96 37.78,55.96 37.63,56.11 37.63,57.27 37.78,57.42 38.71,57.42 P1.151 38.71,57.76 37.78,57.76 37.63,57.91 37.63,59.07 37.78,59.22 38.71,59.22 P1.157 38.71,59.56 37.78,59.56 37.63,59.71 37.63,60.87 37.78,61.02 38.71,61.02 P1.163 38.71,61.36 37.78,61.36 37.63,61.51 37.63,62.67 37.78,62.82 38.71,62.82 P1.169 38.71,63.16 37.78,63.16 37.63,63.31 37.63,66.27 37.78,66.42 38.71,66.42 P1.181 38.71,66.76 37.78,66.76 37.63,66.91 37.63,68.07 37.78,68.22 38.71,68.22 P1.187 38.71,68.56 37.78,68.56 37.63,68.71 37.63,70.47 37.78,70.62 38.51,70.62 38.68,70.79
  Top 0.203: P1.196 30.85,70.92 31.79,70.92 31.94,70.77 31.94,69.01 31.79,68.86 30.85,68.86 P1.188 30.85,68.52 31.79,68.52 31.94,68.37 31.94,67.21 31.79,67.06 30.85,67.06 P1.182 30.85,66.72 31.79,66.72 31.94,66.57 31.94,63.61 31.79,63.46 30.85,63.46 P1.170 30.85,63.12 31.79,63.12 31.94,62.97 31.94,61.81 31.79,61.66 30.85,61.66 P1.164 30.85,61.32 31.79,61.32 31.94,61.17 31.94,58.21 31.79,58.06 30.85,58.06 P1.152 | P1.152 30.85,57.72 31.79,57.72 31.94,57.57 31.94,56.41 31.79,56.26 30.85,56.26 P1.146 30.85,55.92 31.79,55.92 31.94,55.77 31.94,54.61 31.79,54.46 30.85,54.46 P1.140 30.85,54.12 31.79,54.12 31.94,53.97 31.94,52.81 31.79,52.66 30.85,52.66 P1.134 30.85,52.32 31.79,52.32 31.94,52.17 31.94,49.21 31.79,49.06 30.85,49.06 P1.122 30.85,48.72 31.79,48.72 31.94,48.57 31.94,47.41 31.79,47.26 30.85,47.26 P1.116 30.85,46.92 31.79,46.92 31.94,46.77 31.94,45.61 31.79,45.46 30.85,45.46 P1.110 30.85,45.12 31.79,45.12 31.94,44.97 31.94,43.81 31.79,43.66 30.85,43.66 P1.104 30.85,43.32 31.79,43.32 31.94,43.17 31.94,40.21 31.79,40.06 30.85,40.06 P1.92 30.75,39.82 30.85,39.72 31.79,39.72 31.94,39.57 31.94,38.41 31.79,38.26 30.85,38.26 P1.86 30.85,37.92 31.79,37.92 31.94,37.77 31.94,36.61 31.79,36.46 30.85,36.46 P1.80 30.85,36.12 31.79,36.12 31.94,35.97 31.94,34.81 31.79,34.66 30.85,34.66 P1.74 30.85,34.32 31.79,34.32 31.94,34.17 31.94,33.01 31.79,32.86 30.85,32.86 P1.68 30.85,32.52 31.79,32.52 31.94,32.37 31.94,31.21 31.79,31.06 30.85,31.06 P1.62 30.85,30.72 31.79,30.72 31.94,30.57 31.94,29.41 31.79,29.26 30.85,29.26 P1.56 30.85,28.92 31.79,28.92 31.94,28.77 31.94,27.61 31.79,27.46 30.85,27.46 P1.50 30.85,27.12 31.79,27.12 31.94,26.97 31.94,25.81 31.79,25.66 30.85,25.66 P1.44 30.85,25.32 31.79,25.32 31.94,25.17 31.94,20.41 31.79,20.26 30.85,20.26 P1.38 30.85,19.92 31.79,19.92 31.94,19.77 31.94,18.61 31.79,18.46 30.85,18.46 P1.32 30.85,18.12 31.79,18.12 31.94,17.97 31.94,16.81 31.79,16.66 30.85,16.66 P1.26 30.85,16.32 31.79,16.32 31.94,16.17 31.94,15.01 31.79,14.86 30.85,14.86 P1.20 30.85,14.52 31.79,14.52 31.94,14.37 31.94,13.21 31.79,13.06 30.85,13.06 P1.14 30.85,12.72 31.79,12.72 31.94,12.57 31.94,11.41 31.79,11.26 30.85,11.26 P1.8
  Top 0.203: IC1.31 145.95,44.02 145.36,43.43 145.36,42.67 v145.49,42.55 | v127.58,59.56 128.94,59.56 IC1.120
  Top 0.305: v117.8,12.34 U$1.20 | J1.P$4 v171.27,12.58 v171.27,12.57 | J1.GND v171.27,6.48 | 30.75,39.82 30.94,40.01 31.81,40.01 31.99,40.19 31.99,41.39 31.81,41.57 30.8,41.57 P1.98
  Top 0.406: C21.2 115.2,11.14 116.41,12.34 v117.8,12.34
  Route2 0.305: v171.27,12.57 171.27,13.59 171.14,13.72
  Bottom 0.152: v145.49,42.55 145.01,42.07 C4.2 | C3.2 139.54,40.37 v139.52,40.39 | v139.14,49.4 C13.2 | v131.01,58.04 C14.1 | v132.66,62.99 132.72,63.05 C8.2 | v120.09,8.13 v125.42,8.13 v128.47,11.18 128.09,10.79 v125.93,10.79 v119.96,10.79 | v85.42,11.68 85.67,11.94 v85.67,23.24
  Bottom 0.203: C11.2 148.35,50.16 v146.76,50.16 | C15.1 146.57,54.3 v146.5,54.23 | C5.1 146.69,58.49 v146.63,58.55 | C6.1 146.94,62.68 C41.2 145.17,62.93 v145.11,62.87 | C9.2 140.75,63.08 v140.66,62.99 139.52,61.85 137.49,61.85 136.85,62.48 136.85,64.34 C17.2 | C29.2 C28.2 35.55,75.63 35.47,75.71 34.09,75.71 34.01,75.63 C27.2 C30.2 | C24.2 27.57,70.67 27.89,70.99 28.65,70.99 v28.78,71.12 | C23.2 33.03,70.67 v33.35,70.99 | C26.2 37.3,70.99 v36.01,70.99 | v41.35,70.74 41.41,70.67 C25.2 | C34.2 C31.2 | v33.47,65.78 v35.63,65.78 | C32.2 C33.2 | R2.2 27.87,58.82 v28.78,57.91 | v131.01,58.04 129.49,59.56 v127.58,59.56 | C10.2 131.33,61.66 v132.66,62.99 | C7.1 132.85,51.37 v132.92,51.31 | C14.1 v132.79,56.51 v132.79,56.52
  Bottom 0.305: C29.2 45.73,75.63 v45.79,75.69 | C28.2 37.62,78.7 v37.67,78.74 | C27.2 31.7,75.67 v31.7,78.87 | C30.2 v25.85,78.99 | C2.2 136.05,38.69 v135.96,38.61 | v131.14,41.78 131.46,41.78 132.2,41.04 132.2,40.91 132.38,40.73 132.51,40.73 C1.2 | C32.2 v35.63,65.78 | C31.2 v33.47,65.78 | C16.2 152.79,62.74 v154.38,62.74 | C12.2 135.2,47.94 v135.2,49.53
  other vias: 171.27,10.54 173.3,10.54 171.27,8.51 173.3,8.51 173.3,6.48 173.3,12.57 171.27,14.73 173.3,14.73
  pour Route2: 0.1,-1.65 0.1,99.75 181.1,99.75 181.1,-1.65
  pour Top (isolate 0.305, rank 5): 1.09,99.95 180.67,99.95 181.3,99.31 181.3,0.25 180.92,-0.13 0.71,-0.13 0.07,0.51 0.07,99.82 0.2,99.95
N$1  (via drill 0.35)
  Top 0.305: IC1.71 v154.38,64.64
  Bottom 0.305: C16.1 v154.38,64.64
N$2  (via drill 0.35)
  Top 0.203: v134.82,62.99 131.95,65.86 IC1.106
  Bottom 0.203: C17.1 134.84,63.01 v134.82,62.99
N$3  (via drill 0.35)
  Top 0.203: R7.2 arc90 132.79,27.56 v132.79,28.96 | v135.96,26.8 135.96,28.26 C20.2
  Bottom 0.203: v132.79,28.96 134.31,28.96 135.96,27.3 v135.96,26.8
N$4
  Top 0.152: 127.2,14.32 R6.2 | 127.2,14.32 126.19,13.31 125.6,13.31 125.47,13.18 125.47,12.59 U$1.12 | C19.1 130.76,17.88 127.2,14.32
N$5
  Top 0.203: R6.1 129.68,22.41 C18.1
N$6
  Top 0.203: C20.1 136.22,30.29 | 136.22,30.29 R5.1 | 136.22,30.29 136.18,30.33 R4.2 134.19,28.8 134.19,25.02 C18.2 C19.2 132.52,19.68 130.79,21.42 126.35,21.42 126.2,21.27 126.2,15.51 124.57,13.88 U$1.13
N$7
  Top 0.152: U$1.17 U$1.16 U$1.15
  Top 0.305: U$1.17 121.97,18.04 U$2.2 | U$1.16 122.62,18.17 118.06,22.73 117.93,22.61 U$2.2 | U$1.15 123.27,18.66 119.33,22.61 U$2.2
  pour Top (isolate 0.305): 116.02,24.13 116.02,20.83 118.56,20.83 121.74,17.65 121.74,11.43 123.52,11.43 123.52,20.19 118.82,24.89 118.69,25.02 115.9,25.02 116.02,24.89
  pour Top (isolate 0.305, rank 2): 118.95,27.94 113.74,27.94 113.61,27.81 113.61,17.27 118.95,17.27
N$8
  Top 0.305: U$1.19 120.5,12.51 120.5,13.21 117.58,16.13 111.71,16.13 109.17,18.67 109.17,22.46 U$2.1
  Top 0.508: U$1.18 120.98,12.69 120.98,13.97
  pour Top (isolate 0.305, rank 2): 120.47,11.56 120.98,11.56 120.98,14.1 118.18,16.89 112.09,16.89 110.56,18.41 110.56,24.26 108.02,24.26 108.15,24.13 108.15,16.76 109.55,15.37 109.67,15.37 117.17,15.37 117.68,14.86 118.82,13.72 119.2,13.72 119.83,13.72 120.47,13.08
  pour Top (isolate 0.305): 108.15,20.7 107.13,20.7 107.13,24.51 107.26,24.64 111.45,24.64 111.58,24.51 111.58,20.7 111.45,20.57 108.28,20.57
  pour Top (isolate 0.305, rank 3): 107.77,27.94 113.36,27.94 113.36,17.27 107.77,17.27 107.39,17.27 107.39,27.81 107.52,27.94
N$9
  Top 0.152: R8.2 130.82,12.19 128.63,12.19 124.82,8.38 124.82,7.88 125.17,7.52 125.17,7.37 125.22,7.31 U$1.9
N$10
  Top 0.152: U$1.8 124.57,7.69 124.51,7.75 124.51,8.51 138.06,22.06 R9.1
OSC32_IN  (via drill 0.35)
  Top 0.152: 133.4,43.41 LOW_FREQ_OSC.X1
  Top 0.203: IC1.8 134.45,44.46 133.4,43.41 | v133.44,43.45 133.44,41.93 LOW_FREQ_OSC.X1
  Bottom 0.152: C1.1 133.44,41.88 v133.44,43.45
OSC32_OUT  (via drill 0.35)
  Top 0.203: IC1.9 134.95,44.45 v135.94,43.45 135.94,41.93 LOW_FREQ_OSC.X2
  Bottom 0.152: C2.1 135.94,41.79 v135.94,43.45
OSC_IN  (via drill 0.35)
  Top 0.203: IC1.23 141.95,44.34 v141.55,43.94
  Top 0.305: HIGH_FREQ_OSC.1 141.64,43.85 v141.55,43.94
  Bottom 0.203: v141.55,43.94 141.55,42.49 C3.1
OSC_OUT  (via drill 0.35)
  Top 0.152: 143.39,40.39 HIGH_FREQ_OSC.3
  Top 0.203: IC1.24 142.45,41.33 143.39,40.39
  Top 0.305: v145.49,40.13 145.41,40.21 HIGH_FREQ_OSC.3
  Bottom 0.305: C4.1 145.25,40.37 v145.49,40.13
QIO0
  Top 0.203: IC1.58 150.53,57.95 151.28,57.95 151.43,57.8 151.43,57.05 166.06,42.42 174.91,42.42 X1.5
QIO1  (via drill 0.35)
  Top 0.203: IC1.59 150.53,58.45 151.28,58.45 166.17,43.56 v168.6,43.56
  Bottom 0.203: v168.6,43.56 171.29,43.56 X1.4
QIO2
  Top 0.203: IC1.60 163.79,59.05 172.79,50.04 174.91,50.04 X1.11
QIO3
  Top 0.203: IC1.63 164.46,60.55 X1.12
QSPI_CS  (via drill 0.35)
  Top 0.203: IC1.112 127.5,63.55 124.03,60.07 124.03,47.88 133.04,38.86 133.11,38.8 134.44,37.47 155.65,37.47 159.2,37.47 v164.28,42.55
  Bottom 0.203: v164.28,42.55 166.19,44.45 172.94,44.45 X1.6
QSPICLK  (via drill 0.35)
  Top 0.203: IC1.48 152.98,53.05 v153.11,53.18 | v162.13,43.31 162.26,43.18 164.55,43.18 164.92,42.81 164.92,42.8 167.71,40.01 175.21,40.01 176.21,41.01 X1.3
  Bottom 0.203: v153.11,53.18 153.87,52.42 153.87,51.69 162.13,43.43 v162.13,43.31
RESET  (via drill 0.35)
  Top 0.152: 146.5,95 J2.10
  Top 0.203: 146.5,95 125.68,74.18 v125.68,64.01 | v143.08,43.94 142.95,44.07 IC1.25
  Bottom 0.203: v125.68,64.01 125.68,53.85 129.06,50.47 132.04,50.47 132.24,50.67 141.55,50.67 141.97,50.26 141.97,47.27 143.08,46.16 v143.08,43.94
RUN
  Top 0.305: P1.177 39.89,65.39 40.19,65.09 40.19,64.92 41.6,63.5 42.49,63.5 44.27,65.28 R3.1
SWCLK
  Top 0.152: 150.31,94.62 J2.4
  Top 0.203: IC1.109 128.96,73.27 150.31,94.62
SWDIO
  Top 0.152: 151.58,94.11 J2.2
  Top 0.203: IC1.105 132.45,74.97 151.58,94.11
SWO  (via drill 0.35)  (1 unrouted)
  Top 0.203: 149.04,95.64 126.95,73.54 v126.95,64.01 | v126.82,54.1 127.88,53.05 IC1.133
  Bottom 0.203: v126.95,64.01 126.95,54.23 v126.82,54.1
UART5_RX  (via drill 0.35)
  Top 0.203: IC1.116 127.41,61.55 124.79,58.93 v124.79,58.8 | v123.01,58.55 92.05,27.59 P1.51
  Bottom 0.203: v124.79,58.8 124.53,58.55 v123.01,58.55
UART5_TX  (via drill 0.35)
  Top 0.203: IC1.113 127.89,63.05 v124.85,60.01 | v123.14,59.94 91.38,28.19 P1.53
  Bottom 0.203: v124.85,60.01 123.2,60.01 v123.14,59.94
USB_OTGID  (via drill 0.35)
  Top 0.203: v28.78,62.61 30.6,62.61 P1.168
  Bottom 0.203: R2.1 27.65,62.61 v28.78,62.61
VDD  (via drill 0.35)  (1 unrouted)
  Top 0.152: IC1.17 139.07,45.68 139.07,46.39 139.2,46.52 140.2,46.52 141.04,47.37 v141.04,49.4 | IC1.30 145.33,45.68 145.33,46.39 145.19,46.52 143.8,46.52 142.82,47.5 v142.82,49.4 | IC1.144 129.08,47.67 129.79,47.67 130.26,48.13 v130.76,48.13 | IC1.131 129.08,53.92 129.79,53.92 130.38,53.34 v131.14,53.34 | IC1.121 129.08,59.17 129.79,59.17 130.44,59.82 v132.66,59.82 | IC1.108 130.5,66.58 v129.93,66.61 | C37.2 90.93,21.09 C35.1 87.73,19.96 87.73,18.95 v87.7,18.92 | U1.4 v84.78,18.03
  Top 0.203: v138.76,62.99 137.45,64.3 IC1.95 | IC1.84 142.95,63.25 v143.2,62.99 | IC1.72 147.16,65.05 v146.76,64.64 | IC1.52 147.72,55.05 v146.63,56.13 145.62,56.13 145.36,55.88 145.36,53.21 146.25,52.32 v146.89,52.32 | IC1.62 146.91,60.05 v146.38,60.58 | IC1.39 152.06,48.55 v152.09,48.51 | C37.2 91.26,21.3 92.88,21.3
  Top 0.305: P1.193 40.12,70.19 v41.48,68.83 | v42.11,67.31 40.19,69.23 40.19,69.29 39.89,69.59 P1.191 | v27.76,70.04 28.21,70.49 28.44,70.49 28.49,70.44 29.06,70.44 29.11,70.49 P1.194 | P1.192 29.07,69.89 v27.76,68.58 | R3.2 48.32,68.56 v48.33,68.58
  Top 0.406: U1.4 84.78,18.14 C35.1 | 91.26,21.3 91.05,21.09 C35.1 87.73,19.96 | v91.13,20.32 C37.2 92.88,21.3 94.82,23.24 94.82,25.27 v94.56,25.53
  Route3 0.152: v84.78,18.03 85.42,18.67 85.42,18.8 | 131.65,48.01 130.88,48.01 v130.76,48.13
  Route3 0.203: 148.41,60.45 148.28,60.58 | v146.38,60.58 146.25,60.58 | v94.56,25.53 93.8,26.29
  Bottom 0.152: v141.04,49.4 C13.1 | v142.82,49.4 FERRITE_BEAD.1 | v130.76,48.13 C7.2 | v131.14,53.34 C14.2
  Bottom 0.203: v138.76,62.99 138.85,63.09 C9.1 | C41.1 143.27,63.06 v143.2,62.99 | C6.2 146.82,64.58 v146.76,64.64 | C15.2 146.69,56.2 v146.63,56.13 | C5.2 146.57,60.39 v146.38,60.58 | C12.1 137.04,49.34 v136.98,49.4 | v146.89,52.32 147.21,52 C11.1 148.6,52 v152.09,48.51 | C8.1 130.82,65.72 v129.93,66.61 | C25.1 45.6,68.77 v45.67,68.71
  Bottom 0.305: C24.1 24.27,68.77 v24.2,68.71 | C26.1 35.95,68.77 v35.89,68.71 | C23.1 33.41,68.77 v33.47,68.71 | v41.48,68.83 41.54,68.77 C25.1 43.51,68.71 v42.11,67.31 | v27.76,70.04 26.49,68.77 C24.1 | v27.76,68.58 26.05,68.58 C24.1 | C10.1 v132.66,59.82
  other vias: 93.29,20.45 98.37,23.5 97.36,24.51 96.34,23.5 97.36,22.48 95.32,22.48 96.34,21.46 95.32,20.45 94.31,21.46
  pour Route3: 150.57,68.96 150.57,97.79 151.58,98.81 158.19,98.81 158.57,98.42 158.57,69.09 158.19,68.71 155.52,66.04 150.82,66.04 150.57,66.04
  pour Route3 (isolate 0.305, rank 2): 84.15,17.27 84.15,15.24 84.27,15.11 84.4,14.99 85.42,14.99 85.42,17.53 87.58,19.68 87.96,19.68 96.21,19.68 110.94,34.42 134.31,34.42 152.73,34.42 154.12,34.42 154.63,34.92 154.63,67.56 152.35,69.85 126.31,69.85 124.91,69.85 124.79,69.98 122.88,69.98 121.49,68.58 121.49,39.24 120.47,38.23 108.91,38.23 102.05,31.37 92.53,21.84 86.31,21.84 85.67,21.21 85.67,20.07 84.15,18.54
  pour Route3 (isolate 0.305): 94.56,23.24 96.85,25.53 52.65,69.72 41.35,69.72 24.33,69.72 24.2,69.85 23.44,69.09 23.44,68.2 24.46,67.18 51.51,67.18 93.93,24.77 93.93,23.24
  pour Top: 84.15,18.41 84.15,15.37 84.53,14.99 85.29,14.99 85.42,15.11 85.42,17.53 87.58,19.68 96.21,19.68 100.02,23.5 100.02,23.62 100.02,24.51 98.12,26.42 97.1,26.42 92.66,21.97 86.56,21.97 85.67,21.08 85.67,19.94
VDDA  (via drill 0.35)
  Top 0.152: v150.44,44.07 147.39,44.07 147.01,44.45 IC1.33 v147.01,47.88
  Bottom 0.152: R1.1 v150.44,44.07 | v147.01,47.88 FERRITE_BEAD.2
VREF  (via drill 0.35)
  Top 0.152: IC1.32 v146.5,43.31
  Bottom 0.152: 148.28,42.67 R1.2 147.14,42.67 v146.5,43.31